# Altium PCB ESP32_Dev_Board.PcbDoc
Units mil, origin at the board's own origin, x right, y up, seen from the top; angles counter-clockwise.
Board outline 3785 x 3250 mil, 2 copper layers (Top Layer, Bottom Layer); 34 components, 50 nets, 184 pads, 3 vias.
Unrouted connection lines stored in the file: 47.
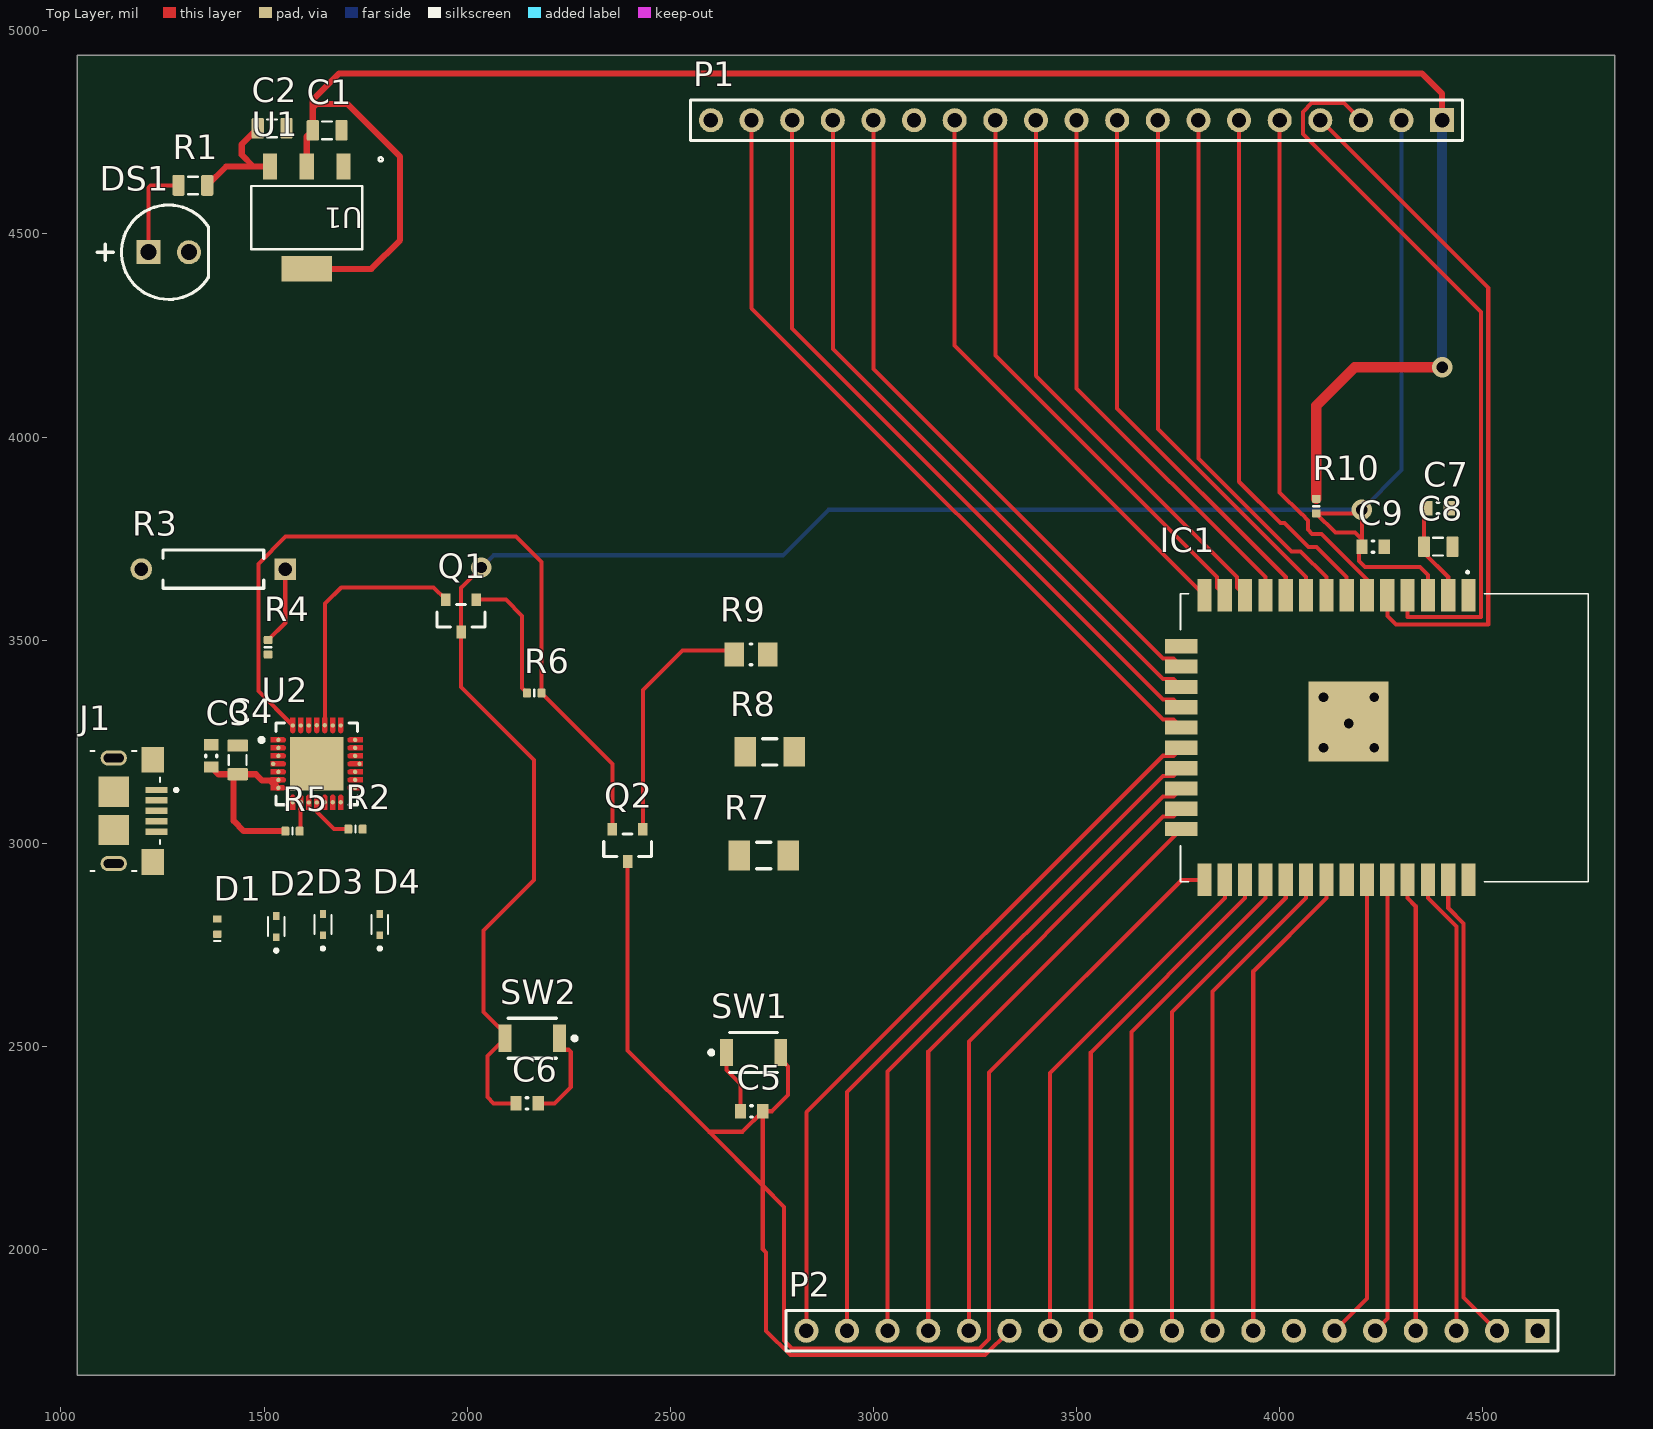
[diagram p0: Top Layer view]
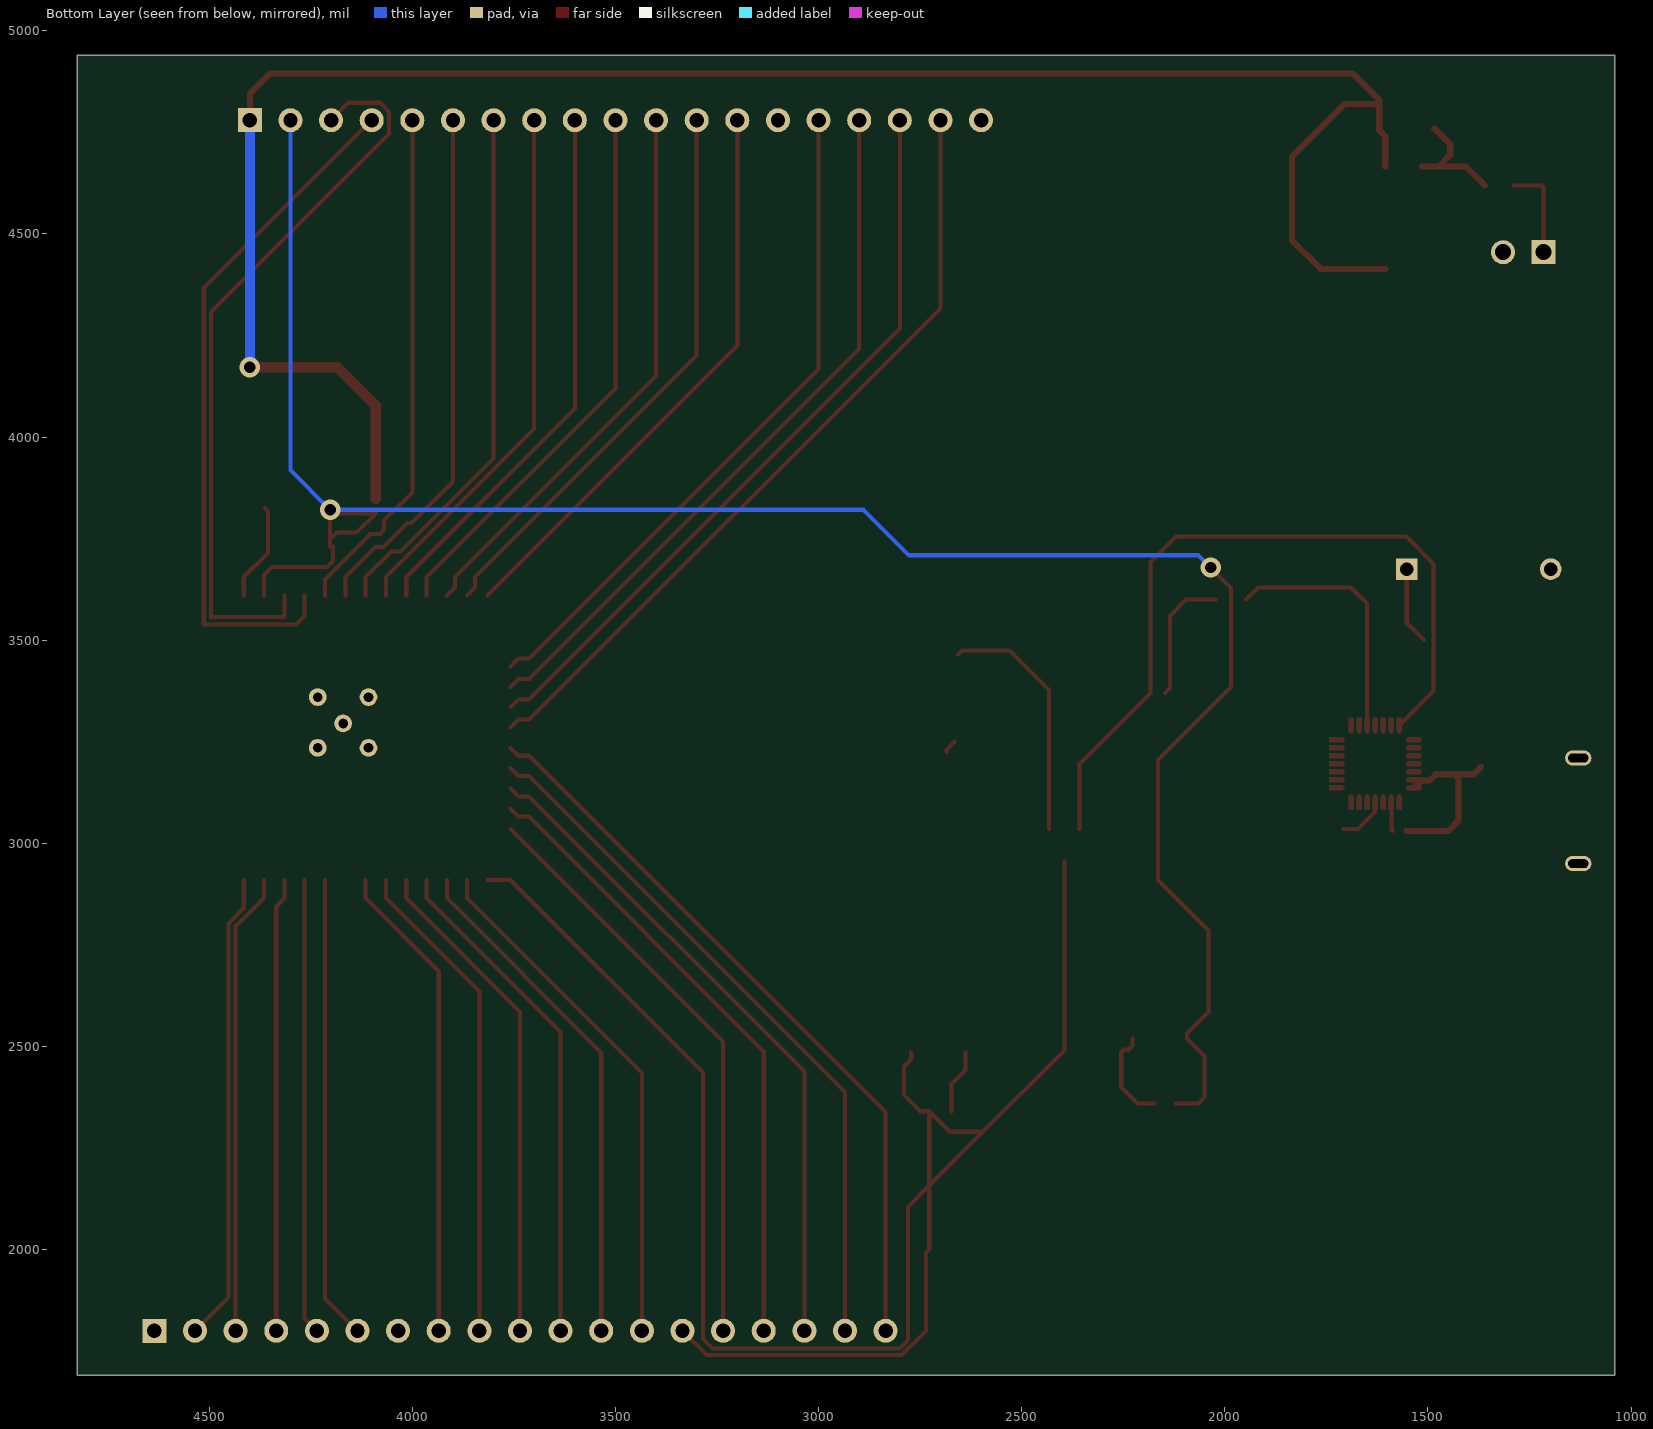
[diagram p1: Bottom Layer view, seen from below]
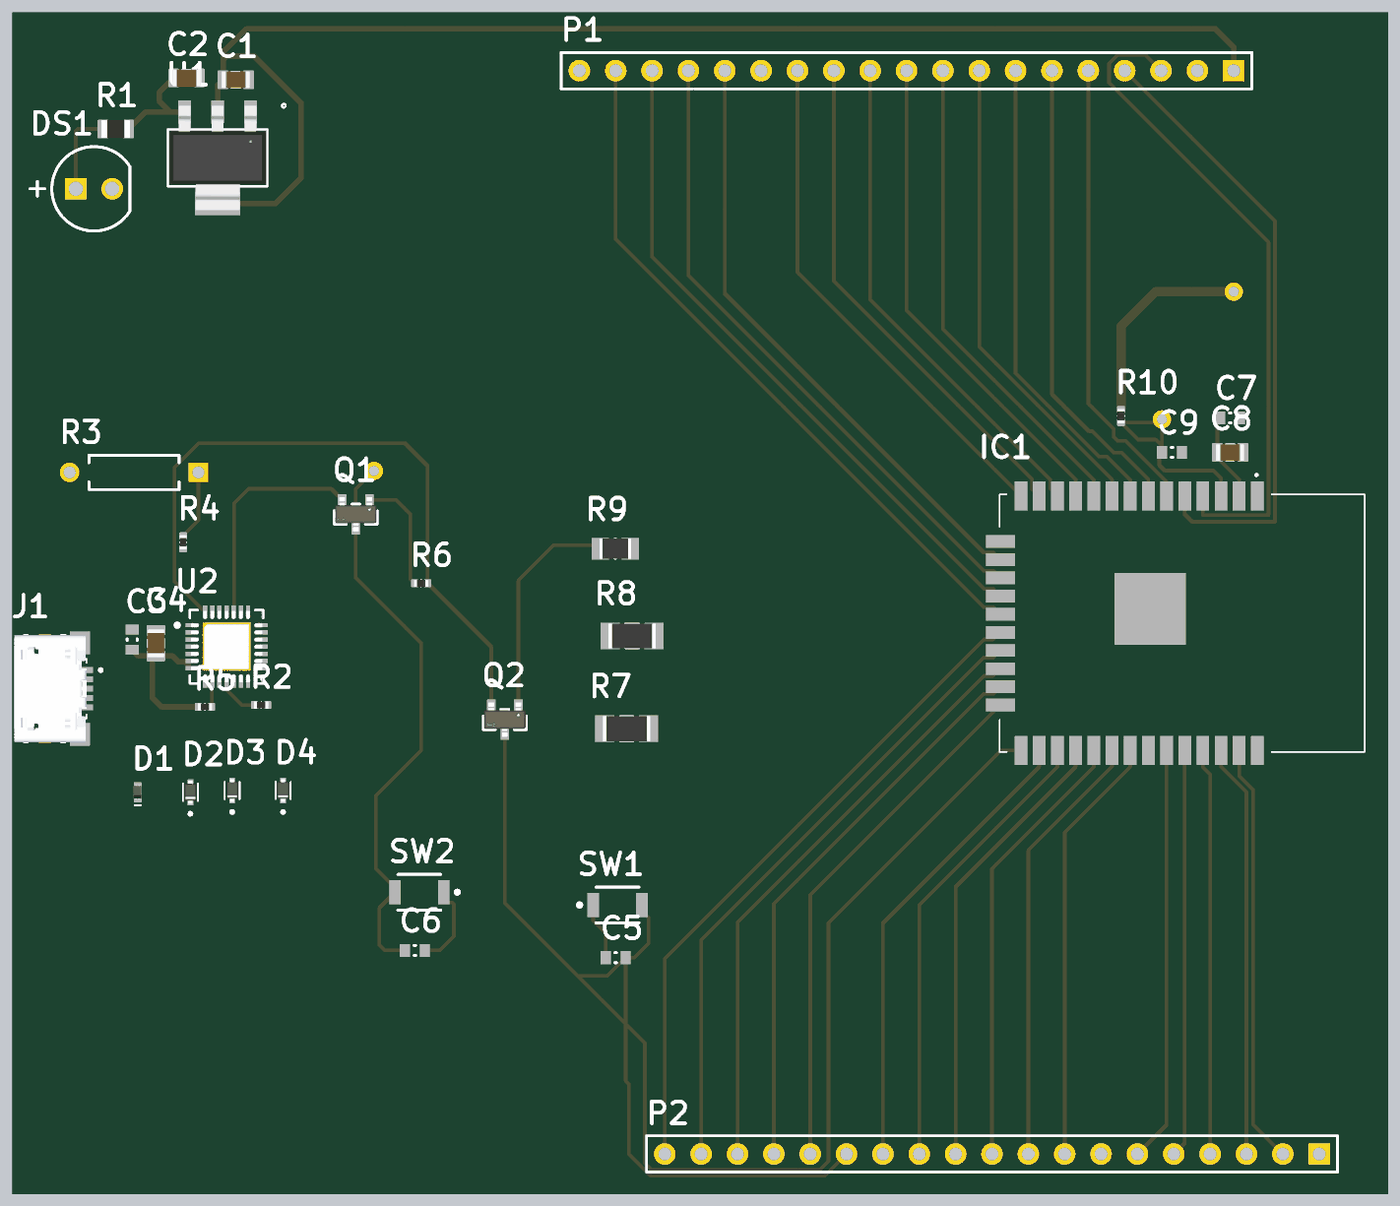
[diagram p2: 3D render of the assembled board from above, using the file's embedded part models]

## Layer stack, top to bottom
Top Solder: solder mask 0.4, Solder Resist, Dk 3.5
Top Layer: signal copper 1.4
Dielectric 1: dielectric 12.6, FR-4, Dk 4.8
Bottom Layer: signal copper 1.4
Bottom Solder: solder mask 0.4, Solder Resist, Dk 3.5

## Board outline
1040,1690 4825,1690 4825,4940 1040,4940

## Design rules (kind name [scope] priority, off if disabled: settings)
Clearance [All] p1: gap=8 ignorepadtopadclearanceinfootprint=FALSE
PolygonConnect [All] p1: connectstyle=Relief reliefconductorwidth=10 reliefentries=4 polygonreliefangle="90 Angle" airgapwidth=10
RoutingVias [All] p1: holewidth=28 width=50 viastyle="Through Hole" minholewidth=28 minwidth=50 maxholewidth=28 maxwidth=50
SolderMaskExpansion [All] p1: expansion=0 istentingtop=FALSE
SupplyNets "Schematic Supply Nets_3" [InNet('3V3')] p1: voltage=0.000
SupplyNets "Schematic Supply Nets_2" [InNet('VUSB')] p2: voltage=0.000
SupplyNets "Schematic Supply Nets_1" [InNet('USB_5V')] p3: voltage=0.000
SupplyNets "Schematic Supply Nets" [InNet('GND')] p4: voltage=0.000
Width Width_Power2 [InNet('3V3')] p1: maxlimit=40 minlimit=15 preferedwidth=25
Width Width_Power1 [InNet('USB_5V')] p2: maxlimit=40 minlimit=15 preferedwidth=25
Width [All] p3: maxlimit=10 minlimit=10 preferedwidth=10
30 further rules are at their usual default settings.

## Classes and differential pairs
component class Micro_USB_&_USB-UART: C3 C4 D1 D2 D3 D4 J1 Q1 Q2 R2 R3 R4 R5 R6 R7 R8 R9 U2
component class ESP32_Module: C7 C8 C9 IC1 R10
component class Connectors_&_Switch_Buttons: C5 C6 P1 P2 SW1 SW2
component class "5V-to-3.3V_Voltage _Regulator": C1 C2 DS1 R1 U1

## Components (designator, comment, footprint, x,y, rotation, side; value= is the part's Value field where it differs from the comment)
C1 "Capacitor 22µF +/-40% 16V 0805" CAPC0805(2012)145_L 1655,4755 r180 top value=22µF
C2 "Capacitor 22µF +/-40% 16V 0805" CAPC0805(2012)145_L 1519.57,4760 r180 top value=22µF
C3 "Cap100nF_50V_0603" 0603C_L 1370,3215 r90 top value=100nF
C4 "Capacitor 4.7µF +/-40% 25V 0805" CAPC0805(2012)145_L 1435.13,3205 r270 top value=4.7µF
C5 "Cap100nF_50V_0603" 0603C_L 2700,2340 r0 top value=100nF
C6 "Cap100nF_50V_0603" 0603C_L 2147.44,2360 r180 top value=100nF
C7 "Cap100nF_50V_0603" 0603C_L 4390,3825 r180 top value=100nF
C8 "Capacitor 22µF +/-40% 16V 0805" CAPC0805(2012)145_L 4390,3730 r180 top value=22µF
C9 "Cap100nF_50V_0603" 0603C_L 4230,3730 r180 top value=100nF
D1 "RB520CM-30" ROHM-VMN2-2_V 1385,2795 r90 top
D2 "LESD5D5.0CT1G" TVS_LESD5D5.0CT1G 1530,2795 r90 top
D3 "LESD5D5.0CT1G" TVS_LESD5D5.0CT1G 1645,2800 r90 top
D4 "LESD5D5.0CT1G" TVS_LESD5D5.0CT1G 1785,2800 r90 top
DS1 "UR502DC" CGX-UR502DC 1265,4455 r0 top
IC1 "ESP-WROOM-32D" ESPWROOM32D 4257.91,3260 r270 top
J1 "10118193-0002LF" AMPHENOL_10118193-0002LF 1130,3080 r270 top
P1 "Header 19" HDR1X19 4400,4780 r180 top
P2 "Header 19" HDR1X19 4635,1800 r180 top
Q1 "SS8050-G" FP-SS8050-G-MFG 1985,3560 r270 top
Q2 "SS8050-G" FP-SS8050-G-MFG 2395,2995 r270 top
R1 "Resistor 1K +/-5% 0805 125 mW" RESC0805(2012)_L 1325,4619.54 r0 top value=1k
R2 "Resistor 10K  +/-1 % 0402 63 mW" RESC0402(1005)_L 1725,3035 r0 top value=10k
R3 "MFR-25FBF52-22K1" RESA60-630X240 1375,3675 r180 top value=22.1k
R4 "Resistor 47K5 +/-1 % 0402 63 mW" RESC0402(1005)_L 1510,3482.72 r90 top value=47.5k
R5 "Resistor 2K +/-5 % 0402 63 mW" RESC0402(1005)_L 1570,3030 r0 top value=2k
R6 "Resistor 10K  +/-1 % 0402 63 mW" RESC0402(1005)_L 2165,3370 r180 top value=10k
R7 "Resistor 0R +/- 5% 1206 250 mW" RESC3216X60X45ML15T20 2730,2970 r180 top value=0
R8 "Resistor 0R +/- 5% 1206 250 mW" RESC3216X60X45ML15T20 2745,3225 r180 top value=0
R9 "Resistor 10k +/-1% 0805 125 mW" RESC2013X50X35ML15T15 2698.66,3465 r180 top value=10k
R10 "Resistor 10K  +/-1 % 0402 63 mW" RESC0402(1005)_L 4090,3830 r90 top value=10k
SW1 "B3U-1000P" OMRON-B3U-1000_V 2705,2485 r0 top
SW2 "B3U-1000P" OMRON-B3U-1000_V 2160,2520 r180 top
U1 "AMS1117-3.3" SOT-223_UMW 1605,4540 r180 top
U2 "CP2102N-A01-GQFN28" FP-CP2102N-A01-GQFN28-MFG 1629.68,3195.51 r0 top

## Footprints (in the part's own frame and the unit in brackets; to place one, negate y for a bottom-side part, rotate by r counter-clockwise, add the part's x,y. Pads: shape width x height; smd on the part's side, far side on the other; paste and mask are expansions set on the pad)
0603C_L [mm]
  rect 0.7x0.9 smd: 1(-0.7,0) 2(0.7,0)
  silkscreen extent -0.05,-0.35 0.05,0.35, body extent -0.87,-0.47 0.88,0.48, height 1
AMPHENOL_10118193-0002LF [mm]
  rect 0.4x1.35 smd: 1(-1.3,2.675) 2(-0.65,2.675) 3(0,2.675) 4(0.65,2.675) 5(1.3,2.675)
  rect 1.6x1.4 smd: S1(-3.2,2.45) S2(3.2,2.45)
  oval 0.95x1.65 hole 0.55 slot 1.25 at 90 deg: S3(-3.3,0) S6(3.3,0)
  rect 1.9x1.9 smd: S4(-1.2,0) S5(1.2,0)
  silkscreen extent -3.75,-1.45 3.75,4, body extent -3.75,-2.15 3.75,2.9, height 2.77
CAPC0805(2012)145_L [mm] "Chip Capacitor, Body 2.0x1.2mm, Height 1.45mm, IPC High Density"
  rrect25% 0.76x1.3 smd: 1(-0.9,0) 2(0.89,0)
  silkscreen extent -0.3,-0.55 0.3,0.55, body extent -1,-0.6 1,0.6, height 1.45
CGX-UR502DC [mm] "THD, 2-Leads, Dia 5.9mm, Pin Spacing 2.54mm"
  rect 1.5x1.5 hole 1: 1(-1.27,0)
  round 1.5 hole 1: 2(1.27,0)
  silkscreen extent -4.47,-2.95 2.5,2.95, body extent -2.95,-2.95 2.5,2.95, height 9.1
ESPWROOM32D [mil]
  rect 80x35 smd: 1(-350,207.09) 2(-350,157.09) 3(-350,107.09) 4(-350,57.09) 5(-350,7.09) 6(-350,-42.91) 7(-350,-92.91) 8(-350,-142.91) 9(-350,-192.91) 10(-350,-242.91) 11(-350,-292.91) 12(-350,-342.91) 13(-350,-392.91) 14(-350,-442.91) 25(350,-442.91) 26(350,-392.91) 27(350,-342.91) 28(350,-292.91) 29(350,-242.91) 30(350,-192.91) 31(350,-142.91) 32(350,-92.91) 33(350,-42.91) 34(350,7.09) 35(350,57.09) 36(350,107.09) 37(350,157.09) 38(350,207.09)
  rect 35x80 smd: 15(-225,-500) 16(-175,-500) 17(-125,-500) 18(-75,-500) 19(-25,-500) 20(25,-500) 21(75,-500) 22(125,-500) 23(175,-500) 24(225,-500)
  rect 196.85x196.85 smd: 39(-39.37,-88.19)
  round 43.62 hole 23.62: P$1(-100,-25) P$2(25,-25) P$3(25,-150) P$4(-100,-150) P$5(-35,-87.5)
  silkscreen extent -409,-502 354,502
FP-CP2102N-A01-GQFN28-MFG [mm]
  round 0.27 smd paste+0 mask+0: 1(-2.4,1.5) 2(-2.4,1) 3(-2.4,0.5) 4(-2.725,0) 5(-2.4,-0.5) 6(-2.4,-1) 7(-2.4,-1.5) 8(-1.5,-2.4) 9(-1,-2.4) 10(-0.5,-2.416) 11(0,-2.416) 12(0.5,-2.4) 13(1,-2.4) 14(1.5,-2.4) 15(2.4,-1.5) 16(2.4,-1) 17(2.4,-0.5) 18(2.675,0) 19(2.4,0.5) 20(2.4,1) 21(2.4,1.5) 22(1.5,2.4) 23(1,2.4) 24(0.5,2.416) 25(0,2.416) 26(-0.5,2.4) 27(-1,2.4) 28(-1.5,2.4)
  rect 3.35x3.35 smd paste-1000 mask+0: 29(0,0)
  Top Layer region: -2.875,0.65 -2.075,0.65 -2.018,0.639 -1.969,0.606 -1.936,0.557 -1.925,0.5 -1.925,0.5 -1.936,0.443 -1.969,0.394 -2.018,0.361 -2.075,0.35 -2.075,0.35 -2.875,0.35
  Top Layer region: -2.875,1.65 -2.075,1.65 -2.018,1.639 -1.969,1.606 -1.936,1.557 -1.925,1.5 -1.925,1.5 -1.936,1.443 -1.969,1.394 -2.018,1.361 -2.075,1.35 -2.075,1.35 -2.875,1.35
  Top Layer region: -2.875,1.15 -2.075,1.15 -2.018,1.139 -1.969,1.106 -1.936,1.057 -1.925,1 -1.925,1 -1.936,0.943 -1.969,0.894 -2.018,0.861 -2.075,0.85 -2.075,0.85 -2.875,0.85
  Top Layer region: -2.875,0.15 -2.075,0.15 -2.018,0.139 -1.969,0.106 -1.936,0.057 -1.925,0 -1.925,0 -1.936,-0.057 -1.969,-0.106 -2.018,-0.139 -2.075,-0.15 -2.075,-0.15 -2.875,-0.15
  Top Layer region: -2.875,-0.35 -2.075,-0.35 -2.018,-0.361 -1.969,-0.394 -1.936,-0.443 -1.925,-0.5 -1.925,-0.5 -1.936,-0.557 -1.969,-0.606 -2.018,-0.639 -2.075,-0.65 -2.075,-0.65 -2.875,-0.65
  Top Layer region: -2.875,-0.85 -2.075,-0.85 -2.018,-0.861 -1.969,-0.894 -1.936,-0.943 -1.925,-1 -1.925,-1 -1.936,-1.057 -1.969,-1.106 -2.018,-1.139 -2.075,-1.15 -2.075,-1.15 -2.875,-1.15
  Top Layer region: -2.875,-1.35 -2.075,-1.35 -2.018,-1.361 -1.969,-1.394 -1.936,-1.443 -1.925,-1.5 -1.925,-1.5 -1.936,-1.557 -1.969,-1.606 -2.018,-1.639 -2.075,-1.65 -2.075,-1.65 -2.875,-1.65
  Top Layer region: -1.65,-2.875 -1.65,-2.075 -1.639,-2.018 -1.606,-1.969 -1.557,-1.936 -1.5,-1.925 -1.5,-1.925 -1.443,-1.936 -1.394,-1.969 -1.361,-2.018 -1.35,-2.075 -1.35,-2.075 -1.35,-2.875
  Top Layer region: -1.15,-2.875 -1.15,-2.075 -1.139,-2.018 -1.106,-1.969 -1.057,-1.936 -1,-1.925 -1,-1.925 -0.943,-1.936 -0.894,-1.969 -0.861,-2.018 -0.85,-2.075 -0.85,-2.075 -0.85,-2.875
  Top Layer region: -0.65,-2.875 -0.65,-2.075 -0.639,-2.018 -0.606,-1.969 -0.557,-1.936 -0.5,-1.925 -0.5,-1.925 -0.443,-1.936 -0.394,-1.969 -0.361,-2.018 -0.35,-2.075 -0.35,-2.075 -0.35,-2.875
  Top Layer region: -0.15,-2.875 -0.15,-2.075 -0.139,-2.018 -0.106,-1.969 -0.057,-1.936 0,-1.925 0,-1.925 0.057,-1.936 0.106,-1.969 0.139,-2.018 0.15,-2.075 0.15,-2.075 0.15,-2.875
  Top Layer region: 0.35,-2.875 0.35,-2.075 0.361,-2.018 0.394,-1.969 0.443,-1.936 0.5,-1.925 0.5,-1.925 0.557,-1.936 0.606,-1.969 0.639,-2.018 0.65,-2.075 0.65,-2.075 0.65,-2.875
  Top Layer region: 0.85,-2.875 0.85,-2.075 0.861,-2.018 0.894,-1.969 0.943,-1.936 1,-1.925 1,-1.925 1.057,-1.936 1.106,-1.969 1.139,-2.018 1.15,-2.075 1.15,-2.075 1.15,-2.875
  Top Layer region: 1.35,-2.875 1.35,-2.075 1.361,-2.018 1.394,-1.969 1.443,-1.936 1.5,-1.925 1.5,-1.925 1.557,-1.936 1.606,-1.969 1.639,-2.018 1.65,-2.075 1.65,-2.075 1.65,-2.875
  Top Layer region: 2.875,-1.65 2.075,-1.65 2.018,-1.639 1.969,-1.606 1.936,-1.557 1.925,-1.5 1.925,-1.5 1.936,-1.443 1.969,-1.394 2.018,-1.361 2.075,-1.35 2.075,-1.35 2.875,-1.35
  Top Layer region: 2.875,-1.15 2.075,-1.15 2.018,-1.139 1.969,-1.106 1.936,-1.057 1.925,-1 1.925,-1 1.936,-0.943 1.969,-0.894 2.018,-0.861 2.075,-0.85 2.075,-0.85 2.875,-0.85
  Top Layer region: 2.875,-0.65 2.075,-0.65 2.018,-0.639 1.969,-0.606 1.936,-0.557 1.925,-0.5 1.925,-0.5 1.936,-0.443 1.969,-0.394 2.018,-0.361 2.075,-0.35 2.075,-0.35 2.875,-0.35
  Top Layer region: 2.875,-0.15 2.075,-0.15 2.018,-0.139 1.969,-0.106 1.936,-0.057 1.925,0 1.925,0 1.936,0.057 1.969,0.106 2.018,0.139 2.075,0.15 2.075,0.15 2.875,0.15
  Top Layer region: 2.875,0.35 2.075,0.35 2.018,0.361 1.969,0.394 1.936,0.443 1.925,0.5 1.925,0.5 1.936,0.557 1.969,0.606 2.018,0.639 2.075,0.65 2.075,0.65 2.875,0.65
  Top Layer region: 2.875,0.85 2.075,0.85 2.018,0.861 1.969,0.894 1.936,0.943 1.925,1 1.925,1 1.936,1.057 1.969,1.106 2.018,1.139 2.075,1.15 2.075,1.15 2.875,1.15
  Top Layer region: 2.875,1.35 2.075,1.35 2.018,1.361 1.969,1.394 1.936,1.443 1.925,1.5 1.925,1.5 1.936,1.557 1.969,1.606 2.018,1.639 2.075,1.65 2.075,1.65 2.875,1.65
  Top Layer region: 1.65,2.875 1.65,2.075 1.639,2.018 1.606,1.969 1.557,1.936 1.5,1.925 1.5,1.925 1.443,1.936 1.394,1.969 1.361,2.018 1.35,2.075 1.35,2.075 1.35,2.875
  Top Layer region: 1.15,2.875 1.15,2.075 1.139,2.018 1.106,1.969 1.057,1.936 1,1.925 1,1.925 0.943,1.936 0.894,1.969 0.861,2.018 0.85,2.075 0.85,2.075 0.85,2.875
  Top Layer region: 0.65,2.875 0.65,2.075 0.639,2.018 0.606,1.969 0.557,1.936 0.5,1.925 0.5,1.925 0.443,1.936 0.394,1.969 0.361,2.018 0.35,2.075 0.35,2.075 0.35,2.875
  Top Layer region: 0.15,2.875 0.15,2.075 0.139,2.018 0.106,1.969 0.057,1.936 0,1.925 0,1.925 -0.057,1.936 -0.106,1.969 -0.139,2.018 -0.15,2.075 -0.15,2.075 -0.15,2.875
  Top Layer region: -0.35,2.875 -0.35,2.075 -0.361,2.018 -0.394,1.969 -0.443,1.936 -0.5,1.925 -0.5,1.925 -0.557,1.936 -0.606,1.969 -0.639,2.018 -0.65,2.075 -0.65,2.075 -0.65,2.875
  Top Layer region: -0.85,2.875 -0.85,2.075 -0.861,2.018 -0.894,1.969 -0.943,1.936 -1,1.925 -1,1.925 -1.057,1.936 -1.106,1.969 -1.139,2.018 -1.15,2.075 -1.15,2.075 -1.15,2.875
  Top Layer region: -1.35,2.875 -1.35,2.075 -1.361,2.018 -1.394,1.969 -1.443,1.936 -1.5,1.925 -1.5,1.925 -1.557,1.936 -1.606,1.969 -1.639,2.018 -1.65,2.075 -1.65,2.075 -1.65,2.875
  silkscreen extent -3.57,-2.55 2.55,2.55, body extent -2.98,-2.98 2.98,2.98, height 0.25
FP-SS8050-G-MFG [mm]
  rect 0.8x0.6 smd paste+0 mask+0: 1(-1.01,0.95) 2(-1.01,-0.95) 3(1.01,0)
  silkscreen extent -0.7,-1.5 0.7,1.5, body extent -1.51,-1.6 1.51,1.6, height 0.25
HDR1X19 [mm] "Connector; Header; 19 Position"
  rect 1.5x1.5 hole 0.9: 1(0,0)
  round 1.5 hole 0.9: 2(2.54,0) 3(5.08,0) 4(7.62,0) 5(10.16,0) 6(12.7,0) 7(15.24,0) 8(17.78,0) 9(20.32,0) 10(22.86,0) 11(25.4,0) 12(27.94,0) 13(30.48,0) 14(33.02,0) 15(35.56,0) 16(38.1,0) 17(40.64,0) 18(43.18,0) 19(45.72,0)
  silkscreen extent -1.27,-1.27 46.99,1.27
OMRON-B3U-1000_V [mm] "SMD, 2-Leads, Body 3x2.5mm"
  rect 0.8x1.7 smd: 1(-1.7,0) 2(1.7,0)
  silkscreen extent -2.77,-1.25 1.5,1.25, body extent -1.5,-1.25 1.5,1.25, height 1.75
RESA60-630X240 [mm] "Axial Resistor, 2-Leads, Dia 2.4mm, Body Length 6.3mm"
  rect 1.35x1.35 hole 0.85: 1(-4.5,0)
  round 1.35 hole 0.85: 2(4.5,0)
  silkscreen extent -3.15,-1.2 3.15,1.2, body extent -4.77,-1.19 4.77,1.2, height 2.4
RESC0402(1005)_L [mm] "Chip Resistor, Body 1.0x0.5mm, IPC High Density"
  rrect25% 0.5x0.55 smd: 1(-0.45,0) 2(0.45,0)
  silkscreen extent 0,-0.2 0,0.2, body extent -0.5,-0.25 0.5,0.25, height 0.3
RESC0805(2012)_L [mm] "Chip Resistor, Body 2.0x1.3mm, IPC High Density"
  rrect25% 0.76x1.3 smd: 1(-0.9,0) 2(0.89,0)
  silkscreen extent -0.3,-0.55 0.3,0.55, body extent -1,-0.62 1,0.63, height 0.6
RESC2013X50X35ML15T15 [mm] "Chip Resistor, 2-Leads, Body 2.2x1.4mm, IPC Low Density"
  rect 1.2x1.5 smd: 1(-1.05,0) 2(1.05,0)
  silkscreen extent -0.05,-0.65 0.05,0.65, body extent -1.1,-0.7 1.1,0.7, height 0.5
RESC3216X60X45ML15T20 [mm] "Chip Resistor, 2-Leads, Body 3.3x1.75mm, IPC Low Density"
  rect 1.35x1.85 smd: 1(-1.525,0) 2(1.525,0)
  silkscreen extent -0.45,-0.82 0.45,0.82, body extent -1.65,-0.87 1.65,0.87, height 0.6
ROHM-VMN2-2_V [mm] "VMN2, 2-Leads, Body 0.9x0.6mm, Pitch 0.95mm"
  rrect25% 0.45x0.55 smd: 1(-0.475,0) 2(0.475,0)
  silkscreen extent -0.9,-0.2 -0.9,0.2, body extent -0.5,-0.3 0.5,0.3, height 0.37
SOT-223_UMW [mil]
  rect 35x63 smd paste+0 mask+0: 1(-90.55,-126) 2(0,-126) 3(90.55,-126)
  rect 124x63 smd paste+0 mask+0: 4(0,126)
  silkscreen extent -187,-148 137,78, body extent -132,-144 132,144, height 71
TVS_LESD5D5.0CT1G [mm]
  rect 0.48x0.4 smd: 1(-0.66,0) 2(0.66,0)
  silkscreen extent -1.6,-0.52 0.6,0.52, body extent -0.8,-0.4 0.8,0.4, height 0.7

## Part data
C1 C2 C8: library part CMP-001-00081-4, "Chip Capacitor, 22µF +/-40%, 16V, 0805, Thickness 1.45 mm", Case/Package=0805, Max Operating Temperature=85°C, Min Operating Temperature=-55°C, Tolerance=5%, Voltage Rating=16V, Mounting Technology=SMT, Pins=2
C3 C5 C6 C7 C9: library part CMP-001-00084-1, "Ceramic Capacitor, Multilayer, Ceramic, 50V, 80% +Tol, 20% -Tol, Y5V, -82/+22% TC, 0.1uF, Surface Mount, 0603", Capacitor Type=Ceramic, Case/Package=0603, Manufacturer=Yageo, Manufacturer Part Number=CC0603ZRY5V9BB104, Max Operating Temperature=85°C, Min Operating Temperature=-30°C, Package Shape=Rectangular, Package Style=SMTMeter, Rated DC Voltage (URdc)=50V, Temperature Characteristics Code=Y5V, Tolerance  (fill in as +-)=20%, Tolerance (fill in as +-)=80%, Component Type=Capacitors, Design Item ID=Cap100nF_50V_0603, Dielectric Material=Ceramic, Height=0.8mm, JESD-609 Code=e3, Length=1.6mm, Mounting Technology="Surface Mount", Multilayer=Yes, Packaging="Tape and Reel", Pins=2, Reach SVHC Compliant=Yes, RoHS Compliant=Yes, Source=WCT.SCHLIB, Terminal Finish=Nickel, Termination=Wraparound, Voltage Rating=50V, Width=0.8mm
C4: library part CMP-001-00080-4, "Chip Capacitor, 4.7µF +/-40%, 25V, 0805, Thickness 1.45 mm", Case/Package=0805, Max Operating Temperature=85°C, Min Operating Temperature=-55°C, Tolerance=20%, Voltage Rating=25V, Mounting Technology=SMT, Pins=2
D1: library part CMP-004-00028-3, "DIODE SCHOTTKY 30V 100MA VMN2M", Case/Package=SMD/SMT, Mounting Technology=SMT, Pins=2
D2 D3 D4: "Transient Voltage Suppressors for ESD Protection", Package=None, Availability="Not in stock", Check_prices=https://www.snapeda.com/parts/LESD5D5.0CT1G/Leshan+Radio+Co./view-part/?ref=eda, MF="Leshan Radio Co.", MP=LESD5D5.0CT1G, Price=None, SnapEDA_Link=https://www.snapeda.com/parts/LESD5D5.0CT1G/Leshan+Radio+Co./view-part/?ref=snap
DS1: library part CMP-007-00009-2, "Red LED, 80 mW, 30 mA, -25 to 85 degC, 2-Pin THD", Manufacturer="Shenzhen CGX", Package Description="2-Pin Through Hole Device, Dia 5.9 mm, Height 9.1 mm", Power=80mW, Case/Package=UR502DC, Datasheet URL=http://datasheet.octopart.com/UR502DC-Chengguangxing-datasheet-62330342.pdf, Datasheet Version=Sep-14, Manufacturer URL=http://szcgx.com/, Mounting Technology=TH, Package Reference=UR502DC, RoHS Compliant=Unknown
IC1: "WiFi / 802.11 Modules", Package=None, Check_prices=https://www.snapeda.com/parts/ESP-WROOM-32D/Espressif+Systems/view-part/?ref=eda, MF="Espressif Systems", MP=ESP-WROOM-32D, SnapEDA_Link=https://www.snapeda.com/parts/ESP-WROOM-32D/Espressif+Systems/view-part/?ref=snap
J1: "Micro USB 2.0, Input Output Connectors, B TYPE RECEPTACLE with flange", Package=None, Check_prices=https://www.snapeda.com/parts/10118193-0002LF/Amphenol+FCI/view-part/?ref=eda, MF="Amphenol ICC (FCI)", MP=10118193-0002LF, SnapEDA_Link=https://www.snapeda.com/parts/10118193-0002LF/Amphenol+FCI/view-part/?ref=snap
P1 P2: "Header, 19-Pin", LatestRevisionDate=17-Jul-2002, LatestRevisionNote="Re-released for DXP Platform.", Publisher="Altium Limited"
Q1 Q2: library part CMP-20235-000001-1, "NPN TRANSISTOR 1.5A 40V SOT-23 R", Case/Package=TO-236-3, Collector Emitter Breakdown Voltage=25V, Collector Emitter Voltage (VCEO)=400mV, Max Collector Current=1.5A, Max Power Dissipation=300mW, Transition Frequency=100MHz, Max Breakdown Voltage=25V, Mount="Surface Mount", Packaging="Tape and Reel", RoHS Compliant=Yes
R1: library part CMP-009-00118-3, "Chip Resistor, 1 kOhms, +/-5%, 125 mW, -55 to 155 degC, 0805", Case/Package=0805, Max Operating Temperature=155°C, Min Operating Temperature=-55°C, Power=125mW, Tolerance=5%, Pins=2
R2 R10: library part CMP-009-00149-3, "Chip Resistor, 10 kOhms, +/-1 %, 63 mW, -55 to 125 degC, 0402", Case/Package=0402, Max Operating Temperature=155°C, Min Operating Temperature=-55°C, Power=63mW, Tolerance=1%, Pins=2
R3: library part CMP-009-00052-4, "Axial Resistor, 22.1 KOhm, +/- 1%, 0.25 W, -55 to 155 degC, 2-Pin THD, RoHS, Bulk", Case/Package=Axial, Manufacturer=Yageo, Max Operating Temperature=155°C, Min Operating Temperature=-55°C, Package Description="2-Pin Axial Lead, Dia 2.4 mm, Body Length 6.3 mm", Package Quantity=200, Package Reference=MFR-25, Power=250mW, Tolerance=1%, Voltage Rating=250V, Datasheet URL=http://www.yageo.com/documents/recent/Yageo%20LR_MFR_2013.pdf, Datasheet Version=Apr-13, Manufacturer URL=http://www.yageo.com/, Mounting Technology=TH, Packaging=Bulk, RoHS Compliant=True
R4: library part CMP-009-00137-3, "Chip Resistor, 47,5 kOhms, +/-1 %, 63 mW, -55 to 155 degC, 0402", Case/Package=0402, Max Operating Temperature=155°C, Min Operating Temperature=-55°C, Power=63mW, Tolerance=1%, Pins=2
R5: library part CMP-009-00138-3, "Chip Resistor, 2 kOhms, +/-5 %, 63 mW, -55 to 155 degC, 0402", Case/Package=0402, Max Operating Temperature=155°C, Min Operating Temperature=-55°C, Power=63mW, Tolerance=5%, Pins=2
R6: library part CMP-009-00149-3, "Chip Resistor, 10 kOhms, +/-5 %, 63 mW, -55 to 125 degC, 0402", Case/Package=0402, Max Operating Temperature=155°C, Min Operating Temperature=-55°C, Power=63mW, Tolerance=1%, Pins=2
R7 R8: library part CMP-009-00002-5, "Chip Resistor, 0 Ohm, +/- 5%, 0.25 W, -55 to 155 degC, 1206 (3216 Metric)", Case/Package=1206, Max Operating Temperature=155°C, Min Operating Temperature=-55°C, Power=250mW, Tolerance=5%, Voltage Rating=200V, Mounting Technology=SM, Pins=2, RoHS Compliant=True
R9: library part CMP-009-00018-5, "Chip Resistor, 10 KOhm, +/- 5%, 125 mW, -55 to 155 degC, 0805 (2012 Metric)", Case/Package=0805, Max Operating Temperature=155°C, Min Operating Temperature=-55°C, Power=125mW, Tolerance=1%, Voltage Rating=150V, Mounting Technology=SM, Pins=2, RoHS Compliant=True
SW1 SW2: library part CMP-011-00000-2, "Tactile Switch, SPST-NO, 0.05 A, 12 V, -25 to 70 degC, 2-Pin SMD, RoHS, Tape and Reel", Case/Package=B3U-1000, Contact Current Rating=50mA, IP Rating=IP40, Manufacturer="Omron Electronic Components", Max Contact Resistance=100mohm, Max Operating Temperature=70°C, Max Voltage Rating (DC)=12V, Min Operating Temperature=-25°C, Operating Force=153gf, Package Description="2-Pin Surface Mount Device, Body 3 x 2.5 mm", Package Quantity=3500, Resistance=0.1Ohm, Contact Material=Silver, Current Rating=50mA, Datasheet URL=http://www.omron.com/ecb/products/pdf/en-b3u.pdf, Datasheet Version=Jan-15, Manufacturer URL=http://www.omron.com/, Max Current Rating=50mA, Mounting Technology=SM, Package Reference=B3U-1000, Packaging=TapeandReel, RoHS Compliant=True, Throw Configuration=SPST, Voltage Rating=12V, Voltage Rating (DC)=12V
U1: "Description", Manufacturer_Name="UMW(Youtai Semiconductor Co., Ltd.)", Copyright="Copyright (C) 2026 Ultra Librarian. All rights reserved.", Manufacturer_Part_Number=AMS1117-3.3, RefDes=RefDes, Type=Type
U2: library part CMP-08093-000004-1, "IC BRIDGE USB TO UART 28QFN", Ambient Temperature Range High=+85°C, Ambient Temperature Range Low=-40°C, Manufacturer="Silicon Labs", Max Junction Temp=+105°C, Max Supply Voltage=5.25V, Min Supply Voltage=1.71V, Nominal Supply Current=195-13700uA, Temperature="-40°C to +85°C", Automotive=No, Category=IC, ComponentLink2Description=Datasheet, ComponentLink2URL=https://media.digikey.com/pdf/Data%20Sheets/Silicon%20Laboratories%20PDFs/CP2102N_Rev.1.3_DS.pdf, Device Class L1="Integrated Circuits (ICs)", Device Class L2="Interface ICs", Device Class L3="USB Interface ICs", Digikey Description="IC BRIDGE USB TO UART 28QFN", Height=0.8mm, Interface=UART,USB,RS-232,RS-485, Ipc Land Pattern Name=QFN50P500X500X75-28, Lead Free=Yes, Manufacturer Part Number=CP2102N-A01-GQFN28, Mouser Description="IC BRIDGE USB TO UART 28QFN", Number Of Ports=1, Octopart=https://octopart.com/cp2102n-a01-gqfn28-silicon+labs-74636024, Package=CP2102N-A01-GQFN28, RoHS=TRUE, Standoff Height=0mm, Temperature Range High=+85°C, Temperature Range Low=-40°C, Usb Standard="USB 2.0"

## Via types
v1: diameter 50, hole 28, Top Layer to Bottom Layer, 3 vias

## Nets (pads, with @x,y where several pads share a name; then routed paths per layer and width w, separated by ;. In a path a pad name is that pad's centre, name@x,y a point inside that pad or via, vN(x,y) a via of type N, cw(c..) or ccw(c..) an arc to the next point about the centre after c; other vN are vias at no path point)
3V3: C1.2 C3.1 C4.2 P1.1 R5.1 R10.2 U1.2 U1.4 U2.6 U2.7 | length 5449.9
  Top Layer w15: C3.1 1387.48,3169.96 C4.2 ; U2.7 1533.35,3136.46 1515.39,3154.42 ; U2.6@1535.2,3154.42 1515.39,3154.42 ; R5.1 1450,3030 1425,3055 1425,3159.83 C4.2 ; U1.4 1764,4414 1835,4485 1835,4690 1705,4820 1630,4820 1619.96,4809.96 ; U1.2 1605,4740.04 C1.2 1619.96,4809.96 ; P1.1 4400,4845 4350,4895 1685,4895 1619.96,4829.96 1619.96,4809.96 ; C4.2 1480.04,3169.96 1495.58,3154.42 1515.39,3154.42
  Top Layer w25: R10.2 4090,4077 4185,4172 v1(4400,4172)
  Bottom Layer w25: v1(4400,4172) P1.1
CLK: IC1.20 P2.19 | length 1832.4
  Top Layer w10: P2.19 2835,2337.97 3712.53,3215.5 3738.41,3215.5 IC1.20
CMD: IC1.19 P1.18 | length 1948.4
  Top Layer w10: P1.18 2700,4317.03 3712.53,3304.5 3738.41,3304.5 IC1.19
DTR: Q2.2 R6.1 U2.28 | length 1913.5
  Top Layer w10: U2.28 1486,3374.63 1486,3688 1553,3755 2120,3755 2182.72,3692.28 R6.1 2357.6,3195.12 Q2.2
EN: C6.2 C9.2 IC1.3 P1.2 Q1.3 R10.1 SW2.2 | length 5415.7
  Top Layer w10: v1(2035,3679) 1985,3629 Q1.3 1985,3385 2165,3205 2165,2910 2040,2785 2040,2585 2093.07,2531.93 SW2.2 2050,2476.93 2050,2375 2065,2360 C6.2 ; v1@4193.28,3812.28 R10.1 4137.28,3765 4185,3765 C9.2@4202.44,3747.56 ; v1(4202.44,3820.88) C9.2@4202.44,3747.56 ; IC1.3 4365,3660 4345,3680 4210,3680 4195,3695 4195,3730 C9.2 C9.2@4202.44,3747.56
  Bottom Layer w10: v1(2035,3679) 2065,3709 2777,3709 2889,3821 4202,3821 v1(4202.44,3820.88) ; v1@4193.28,3812.28 v1(4202.44,3820.88) ; P1.2 4300,3918.44 v1(4202.44,3820.88)
GND: C1.1 C2.1 C3.2 C4.1 C5.1 C6.1 C7.1 C8.1 C9.1 D2.1 D3.1 D4.1 DS1.2 IC1.1 IC1.15 IC1.38 IC1.39 IC1.P$1 IC1.P$2 IC1.P$3 IC1.P$4 IC1.P$5 J1.5 J1.S1 J1.S2 J1.S3 J1.S4 J1.S5 J1.S6 P1.14 P2.1 P2.7 R2.2 R4.1 SW1.1 SW2.1 U1.1 U2.3 U2.29 | length 394.1
  Top Layer w10: C6.1 2215,2360 2255,2400 2255,2485.93 2249.14,2491.79 2237.68,2491.79 2226.93,2502.53 SW2.1 ; SW1.1 2638.07,2442.37 2672.44,2408 C5.1
IO0: C5.2 IC1.25 P2.14 Q2.3 SW1.2 | length 4782.1
  Top Layer w10: Q2.3 2395,2490 2595,2290 ; SW1.2 2771.93,2467.28 2782.68,2456.54 2784.14,2456.54 2790,2450.68 2790,2380 2750.48,2340.48 2728.04,2340.48 C5.2 ; P2.14 3275,1740 2796,1740 2736,1800 2736,1993 2727.56,2001.44 2727.56,2157.44 ; IC1.25 3759,2910 3285,2436 3285,1780 3261,1756 2800,1756 2780,1776 2780,2105 2727.56,2157.44 ; 2595,2290 2727.56,2157.44 ; 2595,2290 2677.56,2290 C5.2 ; 2727.56,2157.44 C5.2
IO2: IC1.24 P2.15 | length 1451.6
  Top Layer w10: P2.15 3235,2512.09 IC1.24
IO4: IC1.26 P2.13 | length 1288.1
  Top Layer w10: P2.13 3435,2435 3865,2865 IC1.26
IO5: IC1.29 P2.10 | length 1226
  Top Layer w10: P2.10 3735,2585 4015,2865 IC1.29
IO12: IC1.14 P1.13 | length 1424.7
  Top Layer w10: P1.13 3200,4225 IC1.14
IO13: IC1.16 P1.15 | length 1674.1
  Top Layer w10: P1.15 3000,4167.03 3712.53,3454.5 3738.41,3454.5 IC1.16
IO14: IC1.13 P1.12 | length 1404
  Top Layer w10: P1.12 3300,4200.88 3845.5,3655.38 3845.5,3629.5 IC1.13
IO15: IC1.23 P2.16 | length 1558.2
  Top Layer w10: P2.16 3135,2487.97 3712.53,3065.5 3738.41,3065.5 IC1.23
IO16: IC1.27 P2.12 | length 1267.4
  Top Layer w10: P2.12 3535,2485 3915,2865 IC1.27
IO17: IC1.28 P2.11 | length 1246.7
  Top Layer w10: P2.11 3635,2535 3965,2865 IC1.28
IO18: IC1.30 P2.9 | length 1205.3
  Top Layer w10: P2.9 3835,2635 4065,2865 IC1.30
IO19: IC1.31 P2.8 | length 1184.6
  Top Layer w10: P2.8 3935,2685 4115,2865 IC1.31
IO21: IC1.33 P2.6 | length 1143.1
  Top Layer w10: P2.6 4215,1880 IC1.33
IO22: IC1.36 P2.3 | length 1139
  Top Layer w10: IC1.36 4365,2865 4435,2795 P2.3
IO23: IC1.37 P2.2 | length 1159.7
  Top Layer w10: IC1.37 4415,2840.46 4453,2802.46 4453,1882 P2.2
IO25: IC1.10 P1.9 | length 1341.9
  Top Layer w10: P1.9 3600,4070 4015,3655 IC1.10
IO26: IC1.11 P1.10 | length 1362.6
  Top Layer w10: P1.10 3500,4120 3965,3655 IC1.11
IO27: IC1.12 P1.11 | length 1383.3
  Top Layer w10: P1.11 3400,4150.88 3895.5,3655.38 3895.5,3629.5 IC1.12
IO32: IC1.8 P1.7 | length 1313.6
  Top Layer w10: P1.7 3800,3947.65 4029.38,3718.27 4051.73,3718.27 4115,3655 IC1.8
IO33: IC1.9 P1.8 | length 1321.2
  Top Layer w10: P1.8 3700,4020 4065,3655 IC1.9
IO34: IC1.6 P1.5 | length 1272.7
  Top Layer w10: P1.5 4000,3863.92 4053.82,3810.11 4054.44,3810.11 4069.47,3795.07 4069.47,3772.36 4080,3761.83 4102.71,3761.83 4215,3649.54 IC1.6
IO35: IC1.7 P1.6 | length 1297.4
  Top Layer w10: P1.6 3900,3889.96 4001.89,3788.07 4011.98,3788.07 4071.05,3729 4091,3729 4165,3655 IC1.7
NetC7_2: C7.2 C8.2 IC1.2 | length 243
  Top Layer w10: C7.2 4354.96,3817.52 C8.2 4354.96,3715.04 4415,3655 IC1.2
NetDS1_1: DS1.1 R1.1 | length 235.7
  Top Layer w10: DS1.1 1215,4613.68 1220.86,4619.54 R1.1
NetQ1_1: Q1.1 R6.2 | length 324.2
  Top Layer w10: Q1.1 2095.24,3599.76 2135,3560 2135,3382.28 R6.2
NetQ2_1: Q2.1 R9.2 | length 612.1
  Top Layer w10: Q2.1 2432.4,3377.4 2530,3475 2647.32,3475 R9.2
NetR2_1: R2.1 U2.11 | length 106.8
  Top Layer w10: 1630.46,3089.54 1630.46,3076.94 1672.4,3035 R2.1
NetR3_1: R3.1 R4.2 U2.8 | length 192
  Top Layer w10: R4.2 1552.17,3542.6 R3.1
NetR5_2: R5.2 U2.9 | length 72.1
  Top Layer w10: R5.2 1589.53,3031.82 1589.53,3100.24 U2.9
RTS: Q1.2 R9.1 U2.24 | length 623.7
  Top Layer w10: U2.24@1650.15,3292.95 1650.15,3590.15 1690,3630 1917.36,3630 Q1.2
RXD: R7.2 U2.25
RXD0: IC1.34 P2.5 R8.1 | length 1122.4
  Top Layer w10: P2.5 4265,1830 IC1.34
SD0: IC1.21 P2.18 | length 1741
  Top Layer w10: P2.18 2935,2387.97 3712.53,3165.5 3738.41,3165.5 IC1.21
SD1: IC1.22 P2.17 | length 1649.6
  Top Layer w10: P2.17 3035,2437.97 3712.53,3115.5 3738.41,3115.5 IC1.22
SD2: IC1.17 P1.16 | length 1765.5
  Top Layer w10: P1.16 2900,4217.03 3712.53,3404.5 3738.41,3404.5 IC1.17
SD3: IC1.18 P1.17 | length 1856.9
  Top Layer w10: P1.17 2800,4267.03 3712.53,3354.5 3738.41,3354.5 IC1.18
SENSOR_VN: IC1.5 P1.4 | length 1719.5
  Top Layer w10: P1.4 4513.5,4366.5 4513.5,3539 4286,3539 4265,3560 IC1.5
SENSOR_VP: IC1.4 P1.3 | length 1828.5
  Top Layer w10: P1.3 4157,4823 4080,4823 4057,4800 4057,4746 4495.5,4307.5 4495.5,3557 4315,3557 IC1.4
TXD: R8.2 U2.26 | length 33.3
  Top Layer w10: R8.2@2665,3250 2684.96,3230.04 R8.2
TXD0: IC1.35 P2.4 R7.1 | length 1118.3
  Top Layer w10: IC1.35 4315,2865 4335,2845 P2.4
USB_5V: C2.2 D1.1 P1.19 R1.2 U1.3 | length 296
  Top Layer w15: R1.2 1406.5,4666 1474,4666 ; C2.2 1445,4720.47 1445,4695 1474,4666 ; U1.3 1474,4666
USB_DN: D4.2 J1.2 U2.5
USB_DP: D2.2 J1.3 U2.4
VUSB: D1.2 D3.2 J1.1 R3.2
pads on no net: IC1.32 J1.4 U2.1 U2.2 U2.10 U2.12 U2.13 U2.14 U2.15 U2.16 U2.17 U2.18 U2.19 U2.20 U2.21 U2.22 U2.23 U2.27

## Silkscreen, mask and mechanical layers (free items; w line width, h text height)
Mechanical 1:
  the board outline again, w10

## Text inside footprints (layer, text, board x,y; h text height)
J1: Top Assembly "PCB Edge" at 1080.79,2902.83 h35.04 r270